# Allegro board AVRUSB500.brd
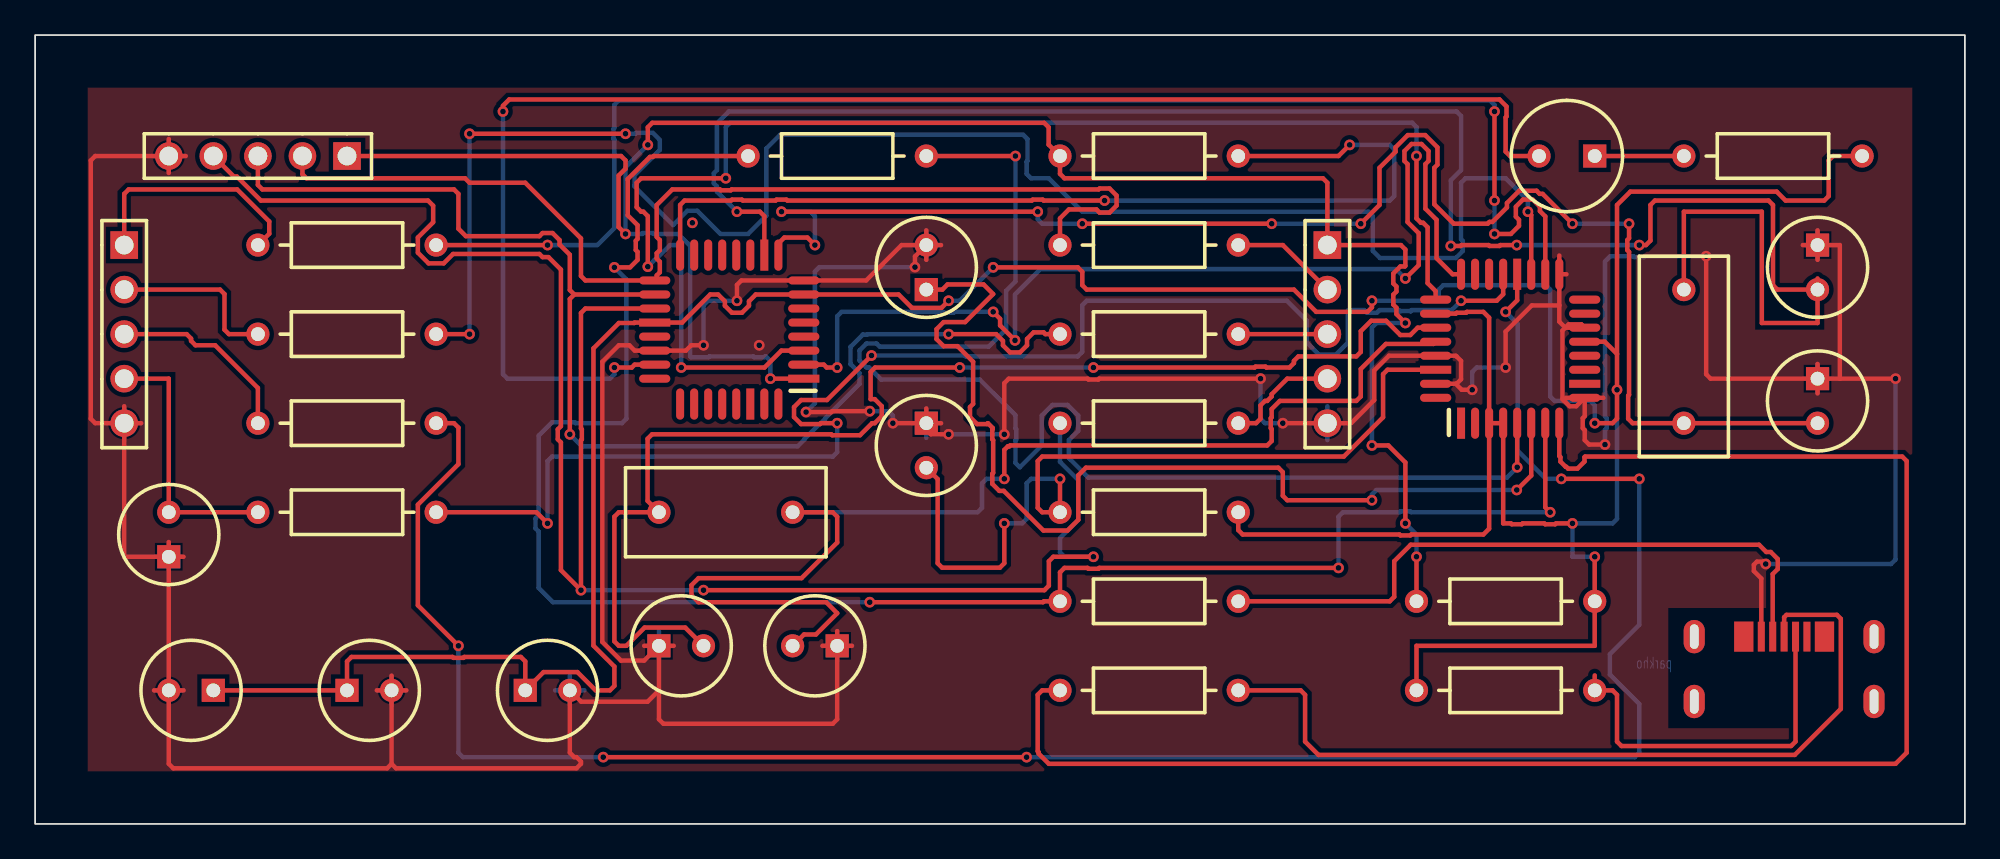
[diagram p0: board, top side]
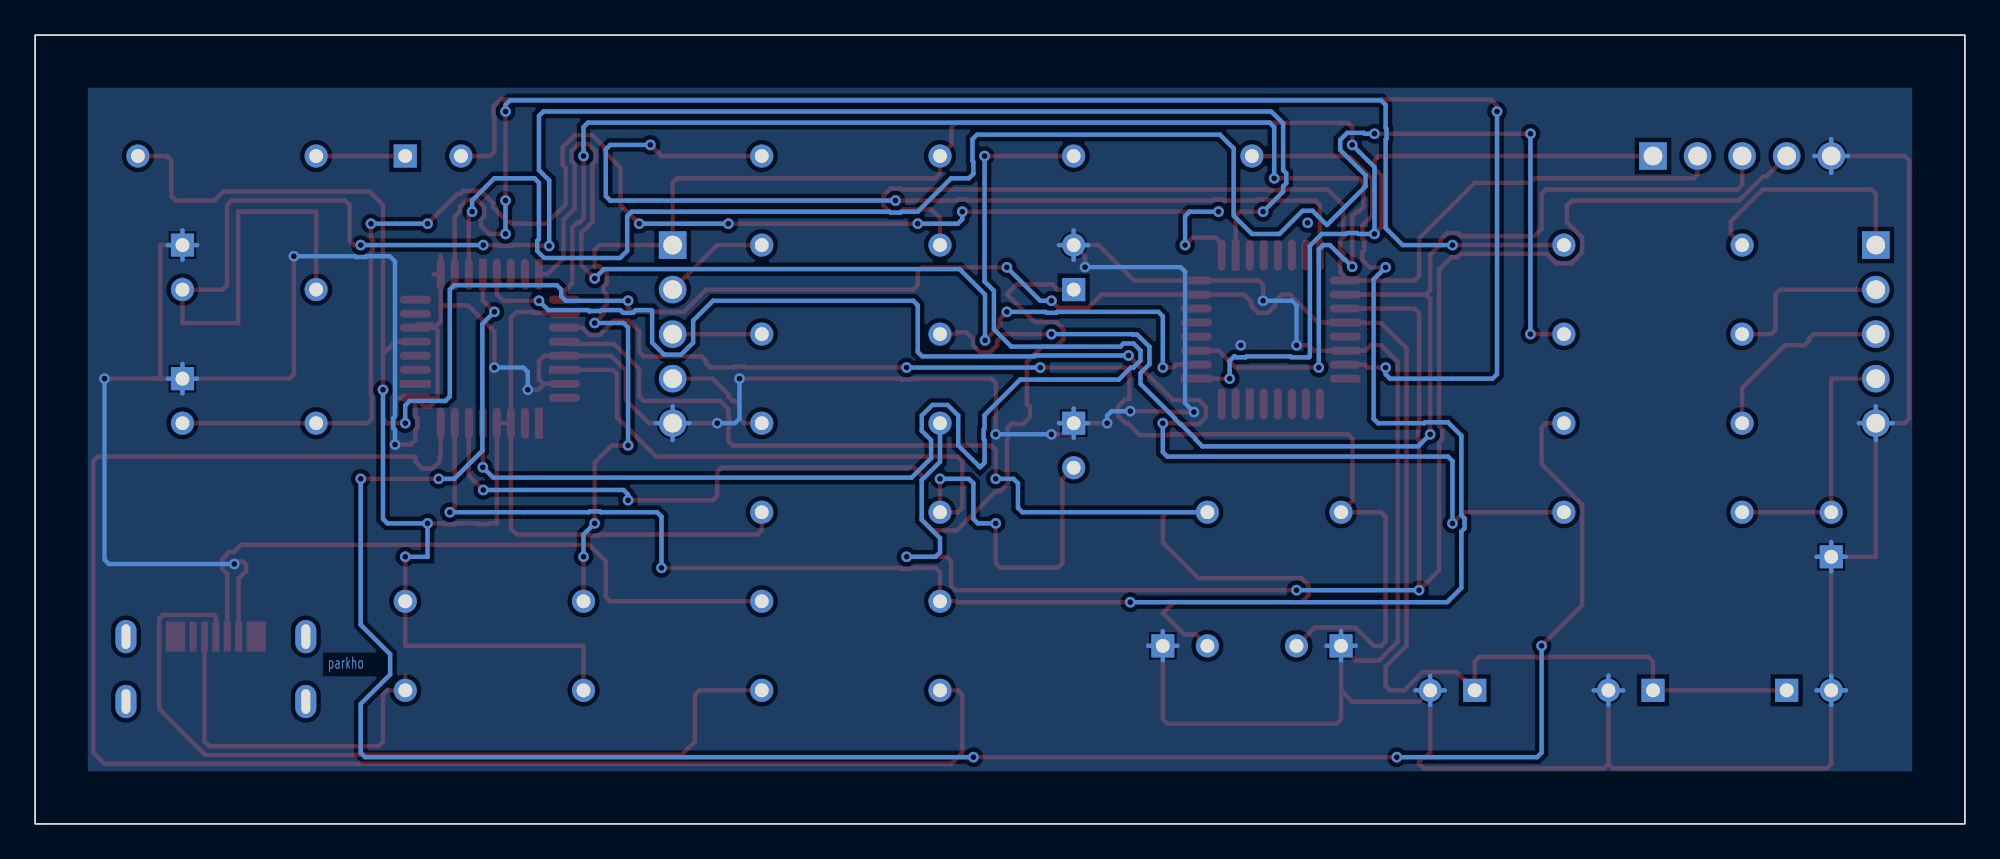
[diagram p1: board, bottom side, seen from below]

Outline 110 x 45 mm; copper layers: TOP, BOTTOM. Coordinates in mm from the lower left corner of the outline.
Outline path: rectangle 0,0 110,45

## Placement (name value [footprint] x y rotation side)
C1  47nF  [CPCYL1D225LS100031]  50.8 22.86 270 top
C2  27pF  [CPCYL1D225LS100031]  45.72 10.16 180 top
C3  27pF  [CPCYL1D225LS100031]  35.56 10.16 0 top
C4  47nF  [CPCYL1D225LS100031]  50.8 30.48 90 top
C5  100nF  [CPCYL1D225LS100031]  17.78 7.62 0 top
C6  1uF  [CPCYL1D225LS100031]  10.16 7.62 180 top
C7  100nF  [CPCYL1D225LS100031]  101.6 25.4 270 top
C8  100nF  [CPCYL1D225LS100031]  101.6 33.02 270 top
C9  100nF  [CPCYL1D225LS100031]  27.94 7.62 0 top
C10  22nF  [CPCYL1D225LS100031]  7.62 15.24 90 top
D1  LED  [CYLD250LS125031]  88.9 38.1 180 top
IC1  ATmega8  [QUAD80M32WG900]  43.81 25.4 90 top
J1  bbpg_Bitbang  [BLKCON100VHTM1SQSW1005]  5.08 33.02 270 top
J2  USBA  [MICRO_USB02DRA]  99.69 6.99 0 top
J3  avrusb500_out  [BLKCON100VHTM1SQSW1005]  73.66 33.02 270 top
J4  firmware_in  [BLKCON100VHTM1SQSW1005]  17.78 38.1 180 top
NOREF  -  []  0 45 0 top
NOREF#2  -  []  109.22 0 90 top
R1  470  [AX400X100031]  58.42 17.78 0 top
R2  220  [AX400X100031]  22.86 17.78 180 top
R3  220  [AX400X100031]  22.86 22.86 180 top
R4  220  [AX400X100031]  22.86 27.94 180 top
R5  27  [AX400X100031]  68.58 7.62 180 top
R6  27  [AX400X100031]  68.58 12.7 180 top
R7  1.5k  [AX400X100031]  40.64 38.1 0 top
R8  2.2  [AX400X100031]  88.9 7.62 180 top
R9  10k  [AX400X100031]  88.9 12.7 180 top
R10  470  [AX400X100031]  93.98 38.1 0 top
R11  1k  [AX400X100031]  58.42 22.86 0 top
R12  220  [AX400X100031]  58.42 27.94 0 top
R13  1k  [AX400X100031]  58.42 33.02 0 top
R14  220  [AX400X100031]  22.86 33.02 180 top
R15  220  [AX400X100031]  68.58 38.1 180 top
U1  FT232BM  [QUAD80M32WG900]  81.28 22.86 0 top
Y1  3.6864Mhz  [RAD450X200LS300031]  93.98 30.48 270 top
Y2  6Mhz  [RAD450X200LS300031]  43.18 17.78 180 top

## Library data of the parts
C1-C5 C7-C10 = CAPACITOR NON-POL: alternate symbols: (SMDCAP)
C6 = CAPACITOR POL: alternate symbols: (SMDCAP)
D1 = LED
IC1 = ATmega8-DIL28_1
J1 J3 J4 = CON5
J2 = CON4_7
R1-R15 = R: alternate symbols: (SMDRES)
U1 = FT232BM_2
Y1 Y2 = ZTA

## Footprints (pads in the part's own frame, mm; a bottom-side part is the same pattern mirrored in y, then rotated)
AX400X100031
  round 1.321 hole 0.787: 1(0,0) 2(10.16,0)
BLKCON100VHTM1SQSW1005
  rect 1.575x1.575 hole 1.067: 1(0,0)
  round 1.575 hole 1.067: 2(2.54,0) 3(5.08,0) 4(7.62,0) 5(10.16,0)
CPCYL1D225LS100031
  rect 1.321x1.321 hole 0.787: 1(0,0)
  round 1.321 hole 0.787: 2(2.54,0)
CYLD250LS125031
  rect 1.321x1.321 hole 0.787: 1(0,0)
  round 1.321 hole 0.787: 2(3.175,0)
MICRO_USB02DRA
  oval 1.2x1.9 hole 0.5x1.4: (-5.125,3.7) (-5.125,0) (5.125,3.7) (5.125,0)
  rect 1.1x1.72 smd: (-2.3,3.7) (2.3,3.7)
  rect 0.4x1.7 smd: 1(-1.3,3.7) 2(-0.65,3.7) 3(0,3.7) 4(0.65,3.7) 5(1.3,3.7)
QUAD80M32WG900
  rect 0.457x1.778 smd: 1(0,0) 20(3.2,8.496)
  oval 0.457x1.778 smd: 2(0.8,0) 3(1.6,0) 4(2.4,0) 5(3.2,0) 6(4,0) 7(4.801,0) 8(5.601,0) 17(5.601,8.496) 18(4.801,8.496) 19(4,8.496) 21(2.4,8.496) 22(1.6,8.496) 23(0.8,8.496) 24(0,8.496)
  oval 1.778x0.457 smd: 9(7.048,1.448) 11(7.048,3.048) 12(7.048,3.848) 13(7.048,4.648) 14(7.048,5.448) 15(7.048,6.248) 16(7.048,7.048) 25(-1.448,7.048) 26(-1.448,6.248) 27(-1.448,5.448) 28(-1.448,4.648) 29(-1.448,3.848) 31(-1.448,2.248) 32(-1.448,1.448)
  rect 1.778x0.457 smd: 10(7.048,2.248) 30(-1.448,3.048)
RAD450X200LS300031
  round 1.321 hole 0.787: 1(0,0) 2(7.62,0)

## Nets
+5V: J2.4 R8.1
GND: C1.1 C2.1 C3.1 C4.2 C5.2 C6.2 C7.1 C8.1 C9.2 C10.1 IC1.8(GND) IC1.22(AGND) J1.5 J2.1 J3.5 J4.5 U1.9(GND) U1.14(PWRCTL) U1.17(GND1) U1.29(AGND) U1.31(TEST)
VCC: C5.1 C6.1 C9.1 IC1.7(VCC) IC1.20(AVCC) R1.2 R8.2 R9.1 R10.2 U1.3(VCC) U1.4(RESET#) U1.13(VCC-IO) U1.26(VCC1)
BMISO: J1.3 R3.2
BMOSI: J1.2 R4.2
BRESET: J1.1 R14.2
BSCK: C10.2 J1.4 R2.2
D+: J2.2 R6.1
D-: J2.3 R5.1
F_MISO: IC1.18((MISO) PB4) J4.3 R12.1
F_MOSI: IC1.17((OC2/MOSI) PB3) J4.2 R13.1
F_SCK: IC1.19((SCK) PB5) J4.4 R11.1
MISO: J3.3 R12.2
MOSI: J3.2 R13.2
RESET: IC1.1(PC6 (R\E\S\E\T\)) J3.1 J4.1 R9.2 R15.2
RXD: IC1.2(PD0 (RXD)) U1.24(RXD)
SCK: J3.4 R11.2
TXD: IC1.3(PD1 (TXD)) U1.25(TXD)
N02483: R6.2 R7.1 U1.7(USBDP)
N02615: R5.2 U1.8(USBDM)
N03527: C4.1 U1.6(3V3OUT)
N06839: R2.1 U1.21(DTR#)
N06967: R3.1 U1.20(DSR#)
N07033: R4.1 U1.19(DCD#)
N07247: R14.1 U1.18(RI#)
N11951: R7.2 U1.5(RSTOUT#)
N15182: C7.2 IC1.9(PB6 (XT1/TOSC1)) Y1.2
N15289: C8.2 IC1.10(PB7 (XT2/TOSC2)) Y1.1
N19734: D1.2(CATHODE) IC1.23((ADC0) PC0)
N20572: D1.1(ANODE) R10.1
N22544: IC1.16((SS/OC1B) PB2) R15.1
N41098: C3.2 U1.27(XTIN) Y2.2
N41106: C2.2 U1.28(XTOUT) Y2.1
N49165: C1.2 R1.1 U1.30(AVCC)

Pads without a net: IC1 4 5 6 11 12 13 14 15 21 24 25 26 27 28 29 30 31 32; J2 5; U1 1 2 10 11 12 15 16 22 23 32

## Via types
v1: diameter 0.61, hole 0.33, TOP to BOTTOM, 92 vias

## Routing (per net, layer and track width the routed paths; a pad name or vN(x,y) marks a point on that pad's centre or on a via; arc(x,y) is an arc through that point)
+5V: length 21.3
  TOP w0.254: 88.9,8.47 R8.1 89.92,7.62 90.17,7.37 90.17,4.7 90.42,4.45 100.09,4.45 100.34,4.7 J2.4
GND: length 371.2
  TOP w0.254: 101.6,32.18 C8.1 ; C8.1 101.6,33.86 ; C8.1 102.87,33.02 102.87,25.4 ; C8.1 100.76,33.02 ; J4.5 8.59,38.1 ; J4.5 7.62,37.13 ; J4.5 7.62,39.07 ; J4.5 3.43,38.1 3.17,37.85 3.17,23.11 3.43,22.86 J1.5 ; C1.1 50.8,23.7 ; C1.1 51.64,22.86 ; C1.1 v1(48.9,22.86) ; C1.1 50.8,22.48 51.05,22.23 v1(52.07,22.23) ; v1(50.15,31.76) 50.15,32.37 C4.2 ; v1(95.25,32.38) 95.25,25.65 95.5,25.4 C7.1 ; 6.78,7.62 C6.2 ; C6.2 C10.1 ; C6.2 8.46,7.62 ; C6.2 7.62,3.43 7.87,3.17 20.07,3.17 20.32,3.43 ; 101.6,24.56 C7.1 ; C7.1 102.87,25.4 ; C7.1 101.6,26.24 ; 80.97,25.11 81.03,25.11 81.28,25.36 81.28,26.42 81.03,26.67 81.01,26.67 80.97,26.71 U1.29 77.17,26.71 76.33,25.86 76.33,24.17 75.01,22.86 J3.5 v1(71.12,22.86) ; 80.97,25.11 81.32,24.77 v1(81.92,24.77) ; 80.97,25.11 U1.31 ; C10.1 7.62,16.08 ; C10.1 5.08,15.24 J1.5 ; C10.1 8.46,15.24 ; J1.5 5.08,23.83 ; J1.5 6.05,22.86 ; 35.56,7.62 34.91,6.97 31.13,6.97 C9.2 30.48,4.06 30.73,3.81 30.86,3.81 31.11,3.56 31.11,3.43 30.86,3.17 20.57,3.17 20.32,3.43 ; 35.56,7.62 C3.1 ; 35.56,7.62 35.56,5.97 35.81,5.71 45.47,5.71 45.72,5.97 C2.1 ; C2.1 44.88,10.16 ; C2.1 46.56,10.16 ; C2.1 45.72,11 ; v1(40.01,29.84) 40.01,30.75 40.26,31 IC1.8 47.37,31 49.39,33.02 C4.2 ; v1(38.1,27.3) 37.4,27.3 37.1,27 34.18,27 33.87,27.3 33.27,27.3 32.33,26.36 32.33,10.38 33.4,9.32 34.72,9.32 C3.1 ; C5.2 21.16,7.62 ; C5.2 19.48,7.62 ; C5.2 20.32,3.43 ; C5.2 20.32,8.46 ; C3.1 34.72,10.16 ; C3.1 36.4,10.16 ; v1(106.05,25.4) 102.87,25.4 ; C4.2 51.64,33.02 ; C4.2 50.8,32.18 ; C4.2 50.8,33.86 ; U1.17 86.88,32.42 ; U1.17 86.88,29.58 ; U1.17 87.29,31.36 ; v1(55.24,22.23) 55.24,25.15 55.5,25.4 59.99,25.4 60.04,25.35 60.61,25.35 60.66,25.4 v1(69.85,25.4) ; v1(89.48,21.64) 88.58,21.64 88.33,21.89 88.33,22.46 88.21,22.58 88.21,23.14 88.33,23.26 U1.9 ; v1(43.95,23.5) 45.38,23.5 45.44,23.55 v1(47.57,23.55) ; 87.22,28.31 U1.14 88.14,28.5 87.42,28.5 87.22,28.31 ; 87.22,28.31 86.88,28.65 86.88,29.58 ; 87.22,28.31 87.06,28.14 87.06,24.24 87.47,23.83 87.85,23.83 U1.9 ; U1.9 87.26,24.31 ; U1.9 89.39,24.31 ; 86.88,29.58 85.31,29.58 83.82,28.09 v1(83.82,26.04) ; J2.1 98.39,14 97.97,14.43 97.97,14.78 98.15,14.96 98.51,14.96 v1(98.65,14.83)
  BOTTOM w0.254: 29.64,7.62 C9.2 ; C9.2 30.48,6.78 ; C9.2 31.32,7.62 ; C9.2 30.48,8.46 ; 6.65,38.1 J4.5 ; J4.5 7.62,37.13 ; J4.5 8.59,38.1 ; J4.5 7.62,39.07 ; 72.69,22.86 J3.5 ; J3.5 73.66,21.89 ; J3.5 73.66,23.83 ; J3.5 74.63,22.86 ; C5.2 21.16,7.62 ; C5.2 19.48,7.62 ; C5.2 20.32,6.78 ; C5.2 20.32,8.46 ; C6.2 8.46,7.62 ; C6.2 6.78,7.62 ; C6.2 7.62,6.78 ; C6.2 7.62,8.46 ; v1(69.85,25.4) 69.85,23.11 70.1,22.86 v1(71.12,22.86) ; C4.2 50.8,33.86 ; C4.2 51.64,33.02 ; C4.2 49.96,33.02 ; C4.2 50.8,32.18 ; C1.1 50.8,23.7 ; C1.1 51.64,22.86 ; C1.1 49.96,22.86 ; C1.1 50.8,22.02 ; v1(81.92,24.77) 81.92,25.78 82.17,26.04 v1(83.82,26.04) ; C2.1 46.56,10.16 ; C2.1 44.88,10.16 ; C2.1 45.72,9.32 ; C2.1 45.72,11 ; 4.11,22.86 J1.5 ; J1.5 6.05,22.86 ; J1.5 5.08,23.83 ; J1.5 5.08,21.89 ; C8.1 101.6,33.86 ; C8.1 102.44,33.02 ; C8.1 101.6,32.18 ; C8.1 100.76,33.02 ; C3.1 35.56,11 ; C3.1 36.4,10.16 ; C3.1 35.56,9.32 ; C3.1 34.72,10.16 ; 6.78,15.24 C10.1 ; C10.1 7.62,14.4 ; C10.1 8.46,15.24 ; C10.1 7.62,16.08 ; v1(95.25,32.38) 91.78,32.38 91.72,32.33 91.16,32.33 91.1,32.38 89.79,32.38 89.48,32.08 89.48,23.25 89.59,23.14 89.59,22.58 89.48,22.47 v1(89.48,21.64) ; v1(43.95,23.5) 44.45,24 44.45,31.51 44.7,31.76 v1(50.15,31.76) ; v1(106.05,25.4) 106.05,15.08 105.79,14.83 v1(98.65,14.83) ; C7.1 101.6,26.24 ; C7.1 100.76,25.4 ; C7.1 102.44,25.4 ; C7.1 101.6,24.56 ; v1(40.01,29.84) 38.35,29.84 38.1,29.59 v1(38.1,27.3) ; v1(48.9,22.86) 48.9,23.29 48.64,23.55 v1(47.57,23.55) ; v1(55.24,22.23) v1(52.07,22.23)
  vias: v1(41.27,27.3)
VCC: length 222.7
  TOP w0.254: v1(52.07,29.84) 51.66,29.44 49.98,29.44 49.22,30.2 IC1.7 41.08,30.2 40.69,29.81 40.69,29.56 40.29,29.16 39.72,29.16 39.32,29.56 39.32,29.81 38.93,30.2 38.48,30.2 36.88,28.6 34.18,28.6 34.15,28.57 33.27,28.57 31.83,27.13 31.83,10.17 33.02,8.98 33.02,7.87 32.77,7.62 31.95,7.62 30.91,8.66 28.98,8.66 C9.1 27.94,9.27 27.69,9.53 24.47,9.53 24.41,9.47 23.85,9.47 23.79,9.53 18.03,9.53 17.78,9.27 C5.1 C6.1 ; v1(54.61,31.75) 59.44,31.75 59.69,31.5 59.69,30.73 59.94,30.48 71.75,30.48 73.03,29.21 75.95,29.21 76.2,29.46 v1(76.2,29.84) ; U1.3 U1.4 83.68,17.14 84.12,17.14 84.17,17.09 84.74,17.09 84.79,17.14 86.02,17.14 86.08,17.09 86.64,17.09 86.7,17.14 v1(87.63,17.14) ; U1.3 82.88,28.88 82.55,29.21 81.62,29.21 81.56,29.16 81.03,29.16 80.97,29.11 U1.26 ; U1.3 82.88,16.84 82.55,16.51 78.44,16.51 78.39,16.46 77.82,16.46 77.77,16.51 68.83,16.51 68.58,16.76 R1.2 ; U1.13 89.47,27.51 90.17,26.81 ; v1(88.9,22.86) 89.92,22.86 90.17,23.11 v1(90.17,24.77) 90.17,26.81 ; 90.17,26.81 90.17,35.31 90.93,36.07 99.27,36.07 99.78,35.56 101.98,35.56 102.23,35.81 102.23,37.85 102.49,38.1 R10.2 ; v1(88.9,15.24) R9.1 88.9,10.16 78.74,10.16 R8.2
  BOTTOM w0.254: v1(88.9,22.86) 88.9,23.88 88.65,24.13 86.61,24.13 86.36,24.38 86.36,30.48 86.11,30.73 80.26,30.73 80.01,30.48 80.01,30.1 79.76,29.84 v1(76.2,29.84) ; v1(54.61,31.75) 52.7,29.84 v1(52.07,29.84) ; v1(88.9,15.24) 87.63,15.24 v1(87.63,17.14) 89.92,17.14 90.17,17.4 v1(90.17,24.77)
BMISO: length 11
  TOP w0.254: R3.2 12.7,24.87 10.26,27.3 9.14,27.3 8.89,27.56 8.89,27.69 8.64,27.94 J1.3
BMOSI: length 9.9
  TOP w0.254: R4.2 11.05,27.94 10.79,28.19 10.79,30.23 10.54,30.48 J1.2
BRESET: length 13.7
  TOP w0.254: R14.2 13.35,33.67 13.35,34.37 11.52,36.2 5.33,36.2 5.08,35.94 J1.1
BSCK: length 15.2
  TOP w0.254: J1.4 7.62,25.4 C10.2 R2.2
D+: length 38.2
  TOP w0.254: R6.1 77.22,12.7 77.47,12.95 77.47,14.99 78.41,15.93 98.27,15.93 98.68,15.51 98.93,15.51 99.33,15.11 99.33,14.54 99.05,14.25 J2.2
D-: length 48.1
  TOP w0.254: J2.3 99.69,11.79 99.83,11.93 102.7,11.93 102.93,11.7 102.93,6.56 100.3,3.94 73.15,3.94 72.39,4.7 72.39,7.37 72.14,7.62 R5.1
F_MISO: length 71.8
  TOP w0.254: J4.3 12.7,36.45 12.95,36.2 23.88,36.2 24.13,35.94 24.13,33.95 24.55,33.53 28.75,33.53 28.93,33.71 29.49,33.71 29.9,33.3 29.9,33.05 30.48,32.47 30.48,30.45 30.73,30.2 ; 35.32,30.2 30.73,30.2 ; 30.73,30.2 30.48,29.95 v1(30.48,22.23) ; R12.1 57.59,27.94 57.49,28.04 56.92,28.04 56.54,27.67 56.54,27.3 56.14,26.9 55.57,26.9 55.17,27.3 55.17,27.55 54.78,27.94 v1(52.07,27.94)
  BOTTOM w0.254: v1(30.48,22.23) 31.17,21.54 43.46,21.54 43.87,21.94 43.87,21.98 44.7,22.81 44.73,22.81 45.03,23.11 45.03,23.14 46.99,25.1 46.99,25.72 46.48,26.23 46.48,27.22 47.18,27.91 47.43,27.91 47.46,27.94 v1(52.07,27.94)
F_MOSI: length 62.1
  TOP w0.254: J4.2 15.24,37.06 15.47,36.83 24.51,36.83 24.77,36.58 27.94,36.58 31.11,33.4 31.11,31.25 31.37,31 35.32,31 35.43,31.11 35.43,31.29 35.61,31.47 35.61,32.07 35.43,32.25 35.43,32.56 35.61,32.74 35.61,33.3 35.43,33.48 35.43,35.31 36.32,36.2 39.03,36.2 39.09,36.14 39.65,36.14 39.71,36.2 60.62,36.2 60.68,36.25 61.24,36.25 61.65,35.84 61.65,35.28 61.24,34.87 60.68,34.87 60.5,35.05 58.93,35.05 58.42,34.54 R13.1
F_SCK: length 105.9
  TOP w0.254: v1(38.1,13.34) 57.53,13.34 57.78,13.59 57.78,14.99 58.04,15.24 v1(60.33,15.24) ; J4.4 11.33,36.93 11.5,36.93 12.87,35.56 22.4,35.56 22.69,35.27 22.69,34.32 21.82,33.45 21.82,32.59 22.43,31.98 23.29,31.98 23.82,32.51 28.75,32.51 28.93,32.33 29.26,32.33 29.97,31.62 29.97,22.69 29.79,22.51 29.79,21.94 29.97,21.76 29.97,14.48 v1(31.11,13.34) 31.11,21.89 31.17,21.94 31.17,22.51 31.11,22.56 31.11,29.15 31.37,29.4 35.32,29.4
  BOTTOM w0.254: v1(60.33,15.24) 58.67,15.24 58.42,15.49 58.42,16.31 59.46,17.35 59.46,19.61 58.42,20.66 R11.1 ; v1(31.11,13.34) v1(38.1,13.34)
MISO: length 5.1
  TOP w0.254: J3.3 R12.2
MOSI: length 6.1
  TOP w0.254: J3.2 71.12,33.02 R13.2
Net_1:
  vias: v1(37.47,34.29)
RESET: length 118.9
  TOP w0.254: v1(78.74,15.24) R9.2 ; v1(34.92,38.73) 34.92,39.74 35.18,39.99 57.52,39.99 57.77,39.74 57.77,38.75 R15.2 58.42,37.08 58.67,36.83 73.41,36.83 73.66,36.58 J3.1 77.85,33.02 78.11,32.77 78.11,31.83 78.07,31.8 77.82,31.8 77.42,31.4 77.42,30.83 77.6,30.65 77.6,30.37 77.42,30.19 77.42,29.62 77.6,29.45 77.6,29.08 v1(78.11,28.57) ; J4.1 33.4,38.1 33.66,37.85 33.66,37.38 33.26,36.98 33.26,34.05 v1(33.66,33.66) ; v1(76.2,21.59) 77.13,21.59 78.11,20.62 v1(78.11,17.14) ; v1(41.91,25.4) IC1.1
  BOTTOM w0.254: v1(34.92,38.73) 33.66,37.47 v1(33.66,33.66) 34.59,33.66 34.64,33.71 35.21,33.71 35.26,33.66 36.66,33.66 37.34,32.98 37.34,26.67 37.39,26.62 38.38,26.62 38.44,26.67 40.94,26.67 40.99,26.62 41.56,26.62 41.61,26.67 41.66,26.67 41.91,26.42 v1(41.91,25.4) ; v1(78.74,15.24) 78.74,16.51 v1(78.11,17.14) ; v1(78.11,28.57) 76.45,28.57 76.2,28.32 v1(76.2,21.59)
RXD: length 59.6
  TOP w0.254: v1(45.72,26.04) 45.12,26.04 44.96,26.2 IC1.2 ; v1(55.85,27.58) 55.01,28.43 55.01,28.81 v1(54.61,29.21) ; v1(78.11,31.11) 78.87,31.88 78.87,33.7 78.23,34.33 78.23,37.64 78.05,37.82 78.05,38.38 78.46,38.79 79.02,38.79 79.43,38.38 79.43,37.82 79.25,37.64 79.25,35.1 79.88,34.46 79.88,32.27 80.8,31.36 U1.24
  BOTTOM w0.254: v1(45.72,26.04) 45.72,28.96 45.97,29.21 51.73,29.21 51.79,29.16 52.35,29.16 52.41,29.21 v1(54.61,29.21) ; v1(78.11,31.11) 77.57,31.65 57.3,31.65 55.85,30.2 v1(55.85,27.58)
SCK: length 6.7
  TOP w0.254: J3.4 71.37,25.4 70.48,24.51 70.48,24.38 70.23,24.13 70.1,24.13 69.85,23.88 69.85,23.11 69.6,22.86 R11.2
TXD: length 79.8
  TOP w0.254: v1(78.74,38.1) 78.74,34.54 78.99,34.29 79.12,34.29 79.38,34.04 79.38,30.85 79.83,30.39 U1.25 ; v1(39.37,36.83) 34.54,36.83 34.29,36.58 34.29,35.18 34.54,34.92 34.67,34.92 34.92,34.67 v1(34.92,31.79) ; v1(36.83,26.04) 41.57,26.04 42.54,27 IC1.3
  BOTTOM w0.254: v1(34.92,31.79) 35.32,32.18 35.36,32.18 36.2,33.02 36.58,33.02 36.83,32.77 v1(36.83,26.04) ; v1(78.74,38.1) 78.74,39.75 78.49,40.01 39.62,40.01 39.37,39.75 v1(39.37,36.83)
N02483: length 105.1
  TOP w0.254: U1.7 86.08,18.06 v1(86.36,17.78) ; R7.1 35.26,38.1 35.21,38.05 35.04,38.05 33.78,36.79 33.78,34.71 34.34,34.16 34.34,33.37 34.24,33.27 34.24,32.74 34.34,32.63 34.34,32.17 33.92,31.75 v1(33.02,31.75) ; v1(47.57,12.65) 57.45,12.65 57.51,12.7 R6.2 58.42,14.35 58.67,14.61 59.99,14.61 60.04,14.55 60.61,14.55 60.66,14.61 v1(74.3,14.61)
  BOTTOM w0.254: v1(74.3,14.61) 74.3,17.53 74.55,17.78 77.77,17.78 77.82,17.83 78.39,17.83 78.44,17.78 v1(86.36,17.78) ; v1(33.02,31.75) 33.71,31.06 33.71,23.11 33.45,22.86 30.82,22.86 30.76,22.91 29.46,22.91 28.7,22.15 28.7,17.61 28.52,17.43 28.52,16.86 28.7,16.68 28.7,13.46 29.52,12.65 v1(47.57,12.65)
N02615: length 94
  TOP w0.254: U1.8 86.88,20.99 86.94,20.92 86.94,20.67 87.24,20.37 87.28,20.37 87.38,20.27 87.91,20.27 88.32,20.67 88.32,20.92 88.35,20.95 106.43,20.95 106.68,20.7 106.68,4.06 106.05,3.43 57.78,3.43 57.2,4.01 57.2,4.09 57.15,4.15 57.15,7.37 57.4,7.62 R5.2
N03527: length 59.6
  TOP w0.254: v1(84.45,19.05) 85.28,19.88 U1.6 ; v1(76.2,18.47) 71.37,18.47 71.12,18.72 71.12,20.07 70.87,20.32 59.9,20.32 59.46,19.89 59.46,17.35 58.85,16.74 57.47,16.74 55.21,19 54.96,19 54.56,19.4 54.56,19.97 54.61,20.02 54.61,21.89 54.56,21.94 54.56,22.51 54.58,22.53 54.58,22.59 54.31,22.86 54.26,22.81 53.69,22.81 53.29,23.21 53.29,23.78 53.47,23.96 53.47,26.36 52.58,27.25 51.79,27.25 51.38,27.66 51.38,28.22 51.79,28.63 53.01,28.63 54.61,30.23 54.06,30.77 52.01,30.77 51.71,30.48 C4.1
  BOTTOM w0.254: v1(76.2,18.47) 76.2,18.8 76.45,19.05 v1(84.45,19.05)
N06839: length 82.1
  TOP w0.254: v1(29.21,17.14) 28.57,17.78 R2.1 ; v1(81.28,29.84) 83.31,29.84 83.68,30.21 U1.21 ; v1(45.72,22.86) 44.79,22.86 44.73,22.81 43.66,22.81 43.26,23.21 43.26,23.78 43.66,24.18 45.14,24.18 v1(47.68,26.72)
  BOTTOM w0.254: v1(81.28,29.84) 80.75,29.31 78.48,29.31 78.41,29.24 78.39,29.26 77.82,29.26 77.8,29.24 77.73,29.31 76.64,29.31 76.48,29.16 75.92,29.16 75.76,29.31 74.86,29.31 74.83,29.28 74.83,27.46 74.14,26.77 73.18,26.77 72.49,27.46 72.49,28.71 71.35,29.84 59.94,29.84 59.69,29.59 59.69,26.92 59.44,26.67 53.04,26.67 52.99,26.72 v1(47.68,26.72) ; v1(45.72,22.86) 45.72,21.21 45.47,20.95 29.46,20.95 29.21,20.7 v1(29.21,17.14)
N06967: length 124.6
  TOP w0.254: R3.1 23.88,22.86 24.13,22.61 24.13,20.52 21.82,18.21 21.82,12.47 v1(24.13,10.16) ; U1.20 84.48,29.87 v1(83.82,29.21) ; v1(32.38,3.81) v1(56.52,3.81) ; v1(91.44,19.68) v1(87,19.68)
  BOTTOM w0.254: v1(24.13,10.16) 24.13,4.06 24.38,3.81 v1(32.38,3.81) ; v1(91.44,19.68) 91.44,11.36 89.76,9.68 89.76,8.52 91.44,6.84 91.44,4.06 91.19,3.81 v1(56.52,3.81) ; v1(87,19.68) 86.11,19.68 84.51,21.29 84.51,28.52 v1(83.82,29.21)
N07033: length 99.4
  TOP w0.254: v1(85.09,34.92) 85.28,34.73 U1.19 ; v1(33.66,39.37) v1(24.77,39.37) ; v1(24.77,27.94) R4.1
  BOTTOM w0.254: v1(85.09,34.92) 85.09,35.56 83.82,36.83 81.53,36.83 81.28,36.58 81.28,33.36 81.38,33.25 81.38,32.68 80.98,32.28 76.66,32.28 76.25,32.69 76.25,34.67 76,34.92 61.3,34.92 61.24,34.87 60.68,34.87 60.62,34.92 59.69,34.92 57.78,36.83 56.77,36.83 56.52,37.08 56.52,37.76 56.57,37.82 56.57,39.06 56.31,39.32 42.47,39.32 41.68,38.53 41.68,34.7 40.64,33.66 39.07,33.66 37.75,34.98 37.18,34.98 36.37,34.16 34.16,36.37 34.16,37 35.61,38.45 35.61,39.02 35.21,39.42 34.27,39.42 34.21,39.37 v1(33.66,39.37) ; v1(24.77,39.37) v1(24.77,27.94)
N07247: length 83.8
  TOP w0.254: v1(83.19,40.64) v1(83.19,35.56) ; U1.18 86.08,34.65 85.78,34.96 85.78,35.21 85.37,35.61 84.81,35.61 84.4,35.21 84.4,34.64 84.58,34.46 84.58,34.12 84.12,33.66 v1(83.19,33.66) ; R14.1 v1(29.21,33.02)
  BOTTOM w0.254: v1(29.21,33.02) 32.05,33.02 33.02,33.99 33.02,39.03 32.97,39.09 32.97,39.65 33.02,39.71 33.02,41.02 33.27,41.27 82.93,41.27 83.19,41.02 v1(83.19,40.64) ; v1(83.19,35.56) v1(83.19,33.66)
N11951: length 75.5
  TOP w0.254: U1.5 v1(84.48,20.34) ; v1(55.88,38.1) R7.2
  BOTTOM w0.254: v1(84.48,20.34) 83.89,19.76 60.04,19.76 58.93,20.87 58.93,21.89 59.46,22.43 59.46,23.29 58.85,23.9 57.99,23.9 57.38,23.29 57.38,21.59 56.13,20.34 55.88,20.6 55.88,21.89 55.93,21.94 55.93,22.51 55.88,22.56 55.88,23.32 53.85,25.35 48.23,25.35 47.54,26.04 47.39,26.04 46.99,26.44 46.99,27.01 47.39,27.41 47.96,27.41 48.14,27.23 54.36,27.23 55.35,28.22 55.35,30.41 55.88,30.94 v1(55.88,38.1)
N15182: length 87.1
  TOP w0.254: C7.2 Y1.2 91.06,22.86 90.81,23.11 90.81,24.43 90.86,24.48 90.86,32.63 90.75,32.74 90.75,33.3 90.86,33.41 v1(90.86,34.24) ; v1(70.48,34.24) v1(59.69,34.24) ; v1(75.56,34.24) 76.63,35.31 76.63,37.43 77.55,38.34 77.55,38.59 78.25,39.29 79.23,39.29 79.93,38.59 79.93,37.61 79.76,37.43 79.76,35.35 80.86,34.24 82.8,34.24 82.9,34.34 83.07,34.34 83.9,35.17 83.9,35.42 84.6,36.12 85.58,36.12 85.76,35.94 85.93,35.94 v1(87.63,34.24) ; v1(57.15,34.92) v1(42.55,34.92) ; v1(44.45,33.02) 44.02,33.45 42.71,33.45 42.37,33.11 IC1.9
  BOTTOM w0.254: v1(42.55,34.92) 44.2,34.92 44.45,34.67 v1(44.45,33.02) ; v1(75.56,34.24) v1(70.48,34.24) ; v1(57.15,34.92) 57.15,34.49 57.4,34.24 v1(59.69,34.24) ; v1(90.86,34.24) v1(87.63,34.24)
N15289: length 109
  TOP w0.254: v1(80.7,32.97) 81.25,32.97 81.31,33.02 82.85,33.02 82.9,32.97 83.47,32.97 83.52,33.02 v1(84.45,33.02) ; 101.6,31.11 C8.2 ; C8.2 99.31,30.48 99.06,30.73 99.06,35.31 98.81,35.56 92.33,35.56 92.08,35.31 92.08,33.27 91.82,33.02 v1(91.44,33.02) ; C8.2 101.6,28.57 98.42,28.57 98.42,34.92 93.98,34.92 Y1.1 ; v1(40.01,34.92) 41.31,34.92 41.57,34.67 IC1.10
  BOTTOM w0.254: v1(80.7,32.97) 80.7,36.71 81.28,37.29 81.28,40.39 81.03,40.64 39.54,40.64 38.86,39.96 38.86,37.29 38.68,37.11 38.68,36.55 38.86,36.37 38.86,36.07 v1(40.01,34.92) ; v1(91.44,33.02) v1(84.45,33.02)
N19734: length 86.7
  TOP w0.254: v1(26.67,40.64) 26.67,40.97 27.03,41.33 83.47,41.33 83.87,40.92 83.87,40.36 83.82,40.3 83.82,38.35 84.07,38.1 85.72,38.1 ; v1(33.02,26.04) 34.01,26.04 34.18,26.2 35.32,26.2
  BOTTOM w0.254: v1(26.67,40.64) 26.67,25.65 26.92,25.4 32.77,25.4 33.02,25.65 v1(33.02,26.04)
N20572: length 5.1
  TOP w0.254: R10.1 D1.1
N22544: length 55.8
  TOP w0.254: 36.77,32.45 36.77,35.31 37.02,35.56 39.67,35.56 39.72,35.61 40.29,35.61 40.34,35.56 42.21,35.56 42.26,35.61 42.83,35.61 42.88,35.56 56.81,35.56 56.87,35.61 57.43,35.61 57.49,35.56 v1(60.96,35.56) ; R15.1 74.3,38.1 v1(74.93,38.73)
  BOTTOM w0.254: v1(60.96,35.56) 77.22,35.56 77.47,35.81 77.47,38.48 77.22,38.73 v1(74.93,38.73)
N41098: length 71.8
  TOP w0.254: U1.27 78.81,28.31 78.39,27.89 77.82,27.89 77.01,28.7 76.16,28.7 75.56,28.11 75.56,26.92 75.31,26.67 72.01,26.67 71.75,26.42 71.75,26.29 71.5,26.04 70.19,26.04 70.13,26.09 69.57,26.09 69.51,26.04 v1(60.33,26.04) ; C3.2 37.06,11.2 34.74,11.2 33.7,10.16 33.27,10.16 33.02,10.41 33.02,17.53 33.27,17.78 Y2.2 34.91,18.43 34.91,21.97 35.17,22.23 45.38,22.23 45.44,22.17 47.02,22.17 47.71,22.86 47.86,22.86 48.26,23.26 48.26,23.83 47.86,24.23 47.62,24.23 47.62,25.78 47.88,26.04 v1(52.7,26.04)
  BOTTOM w0.254: v1(52.7,26.04) v1(60.33,26.04)
N41106: length 70.5
  TOP w0.254: v1(55.24,19.68) 55.24,21.34 55.45,21.54 55.53,21.54 55.58,21.59 70.23,21.59 70.48,21.84 70.48,22.52 70.43,22.58 70.43,23.14 70.48,23.2 70.48,23.67 70.95,24.13 75.31,24.13 75.56,24.38 75.56,25.95 76.99,27.38 79.7,27.38 U1.28 ; Y2.1 45.47,17.78 45.72,17.53 45.72,16.05 43.69,14.02 37.82,14.02 37.41,13.62 37.41,13.05 37.82,12.65 45.09,12.65 45.72,12.02 44.51,10.81 43.83,10.81 C2.2
  BOTTOM w0.254: Y2.1 53.72,17.78 53.98,18.03 53.98,19.43 54.23,19.68 v1(55.24,19.68)
N49165: length 49.6
  TOP w0.254: v1(55.24,17.14) 55.24,14.87 54.99,14.62 51.7,14.62 51.45,14.87 51.45,19.67 C1.2 ; U1.30 77.09,25.91 76.83,25.65 76.83,23.2 74.59,20.95 57.4,20.95 57.15,20.7 57.15,18.03 57.4,17.78 R1.1 v1(58.42,19.68)
  BOTTOM w0.254: v1(55.24,17.14) 56.26,17.14 56.52,17.4 56.52,19.43 56.77,19.68 v1(58.42,19.68)

## Copper pours and planes (outline as drawn; the poured copper is in the pictures)
+5V on TOP: 106.05,12.06 106.05,5.71 93.34,5.71 93.34,12.06 ; 2 cut-outs
GND on TOP: 3,3 3,42 107,42 107,3 ; 33 cut-outs
GND on BOTTOM: 3,3 3,42 107,42 107,3

## Text on the board
BOTTOM: parkho
